# Altium PCB mini.PcbDoc
Units mil, origin at the board's own origin, x right, y up, seen from the top; angles counter-clockwise.
Board outline 2650 x 3065 mil, 2 copper layers (Top Layer, Bottom Layer); 37 components, 22 nets, 96 pads, 19 vias.
Unrouted connection lines stored in the file: 1.
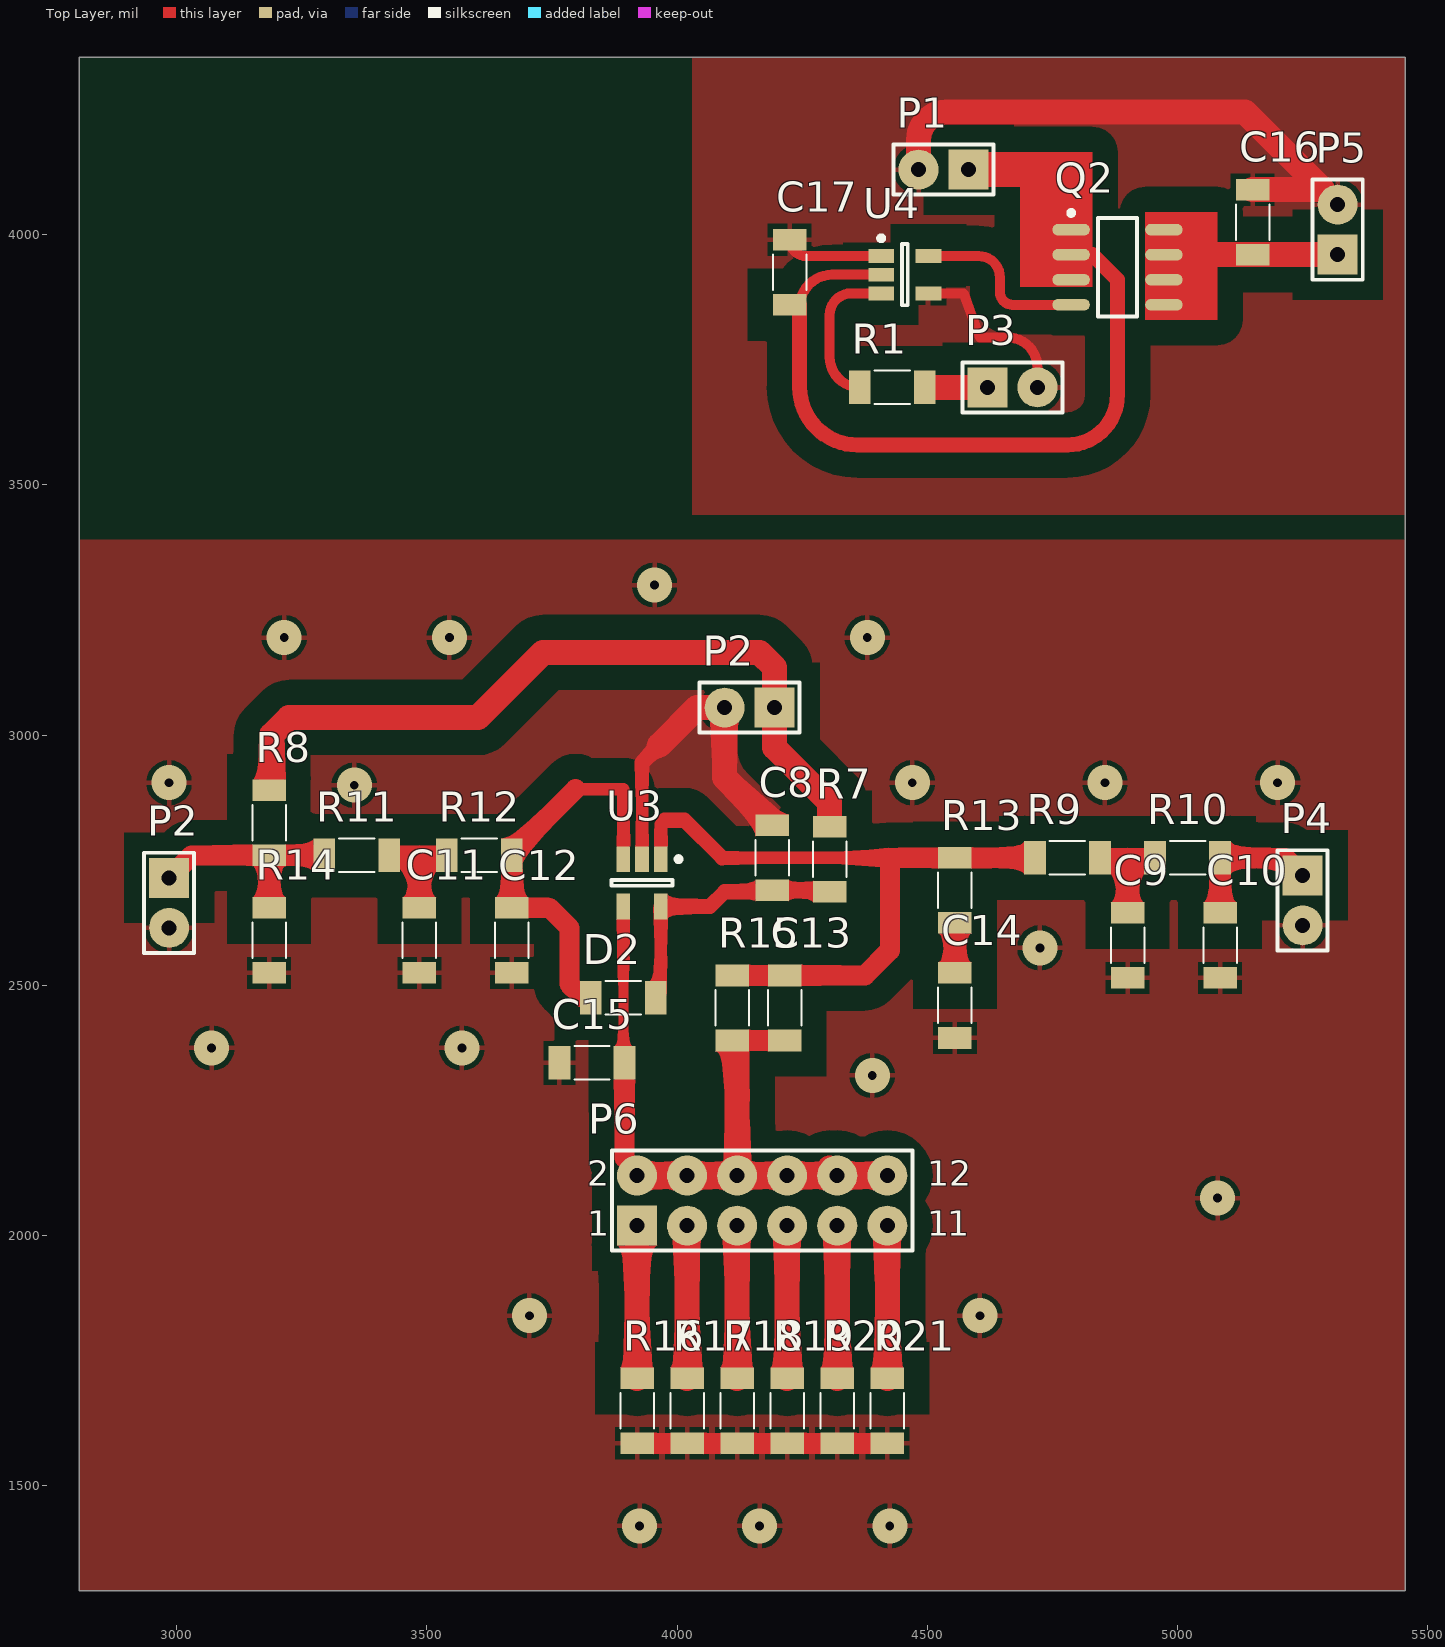
[diagram p0: Top Layer view]
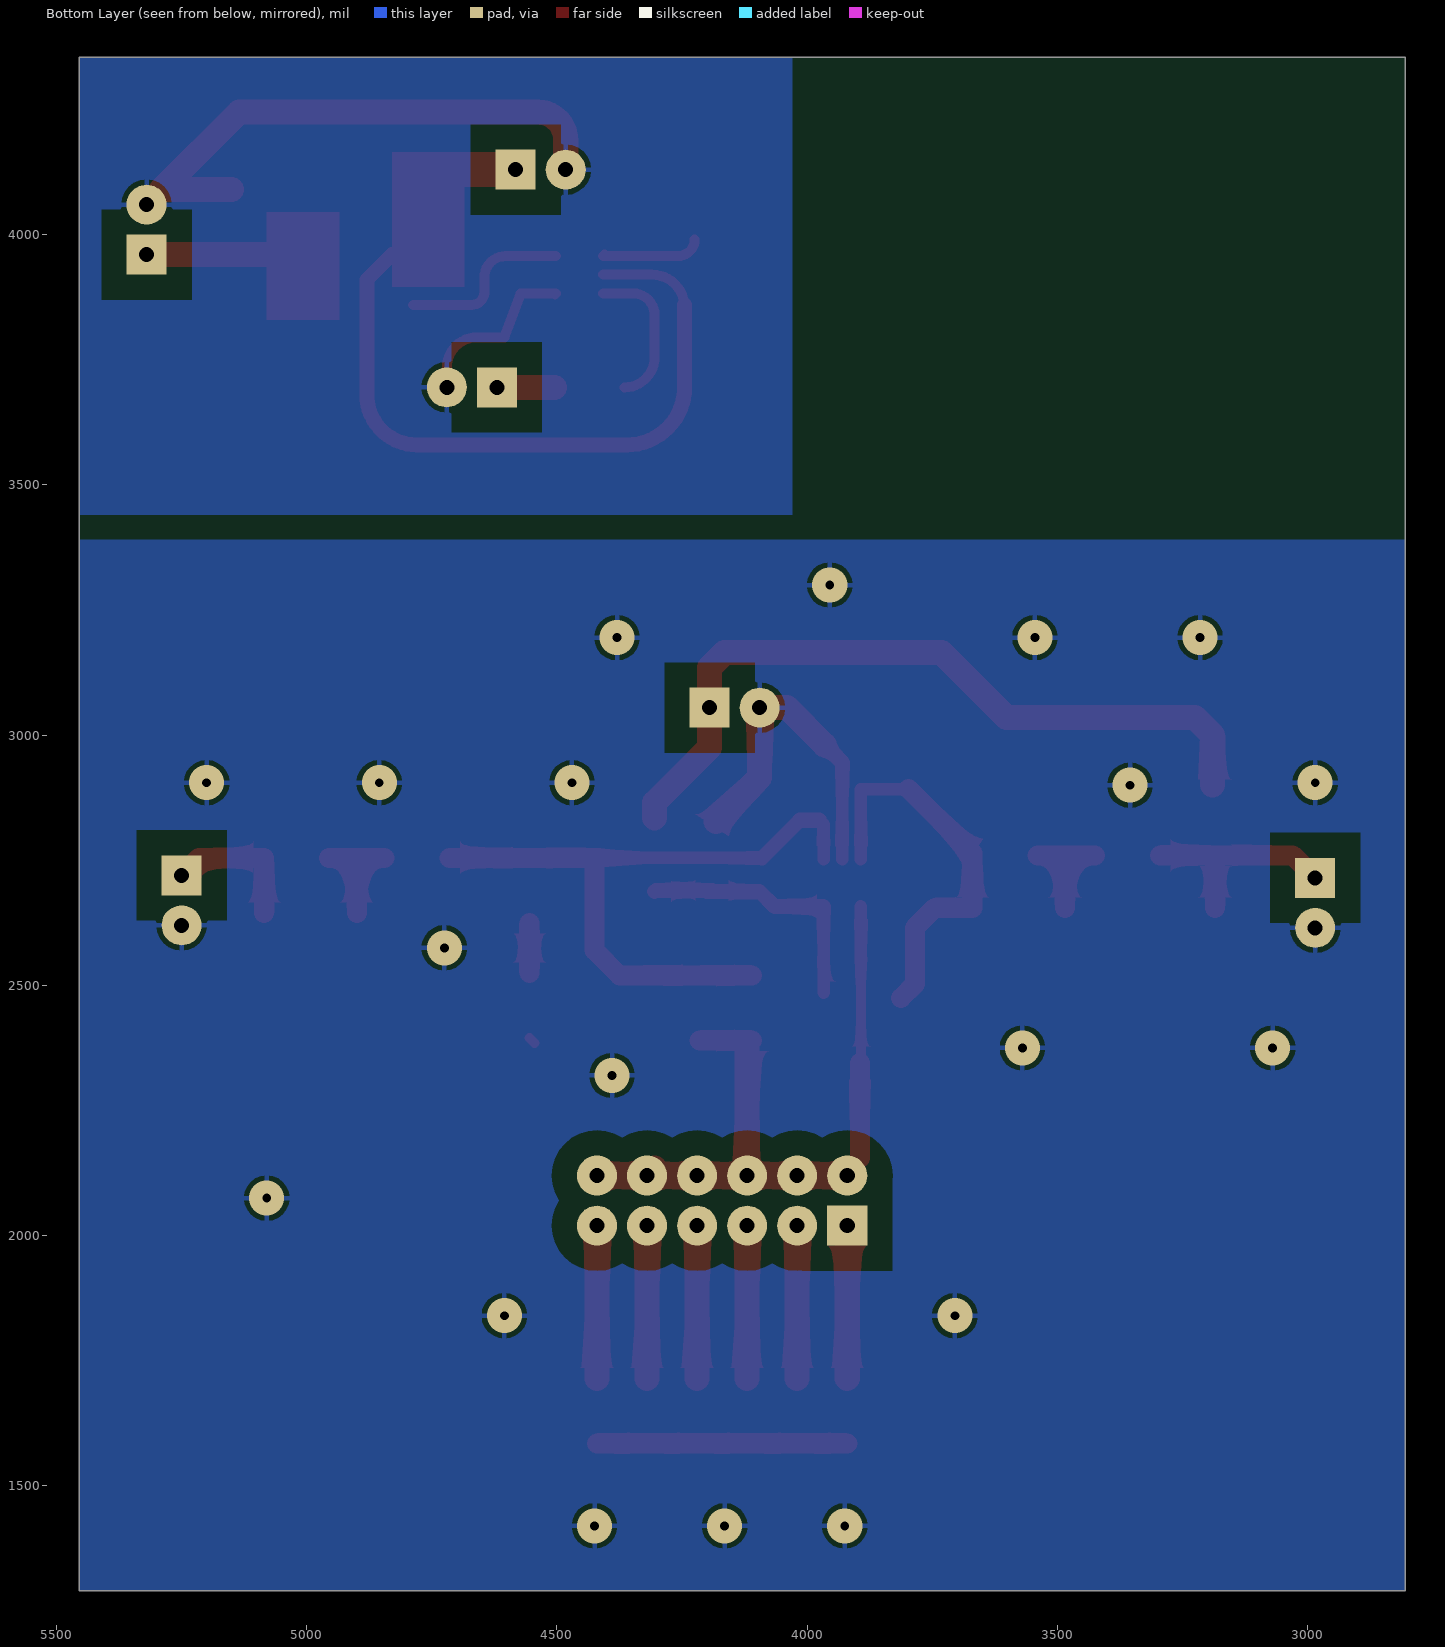
[diagram p1: Bottom Layer view, seen from below]
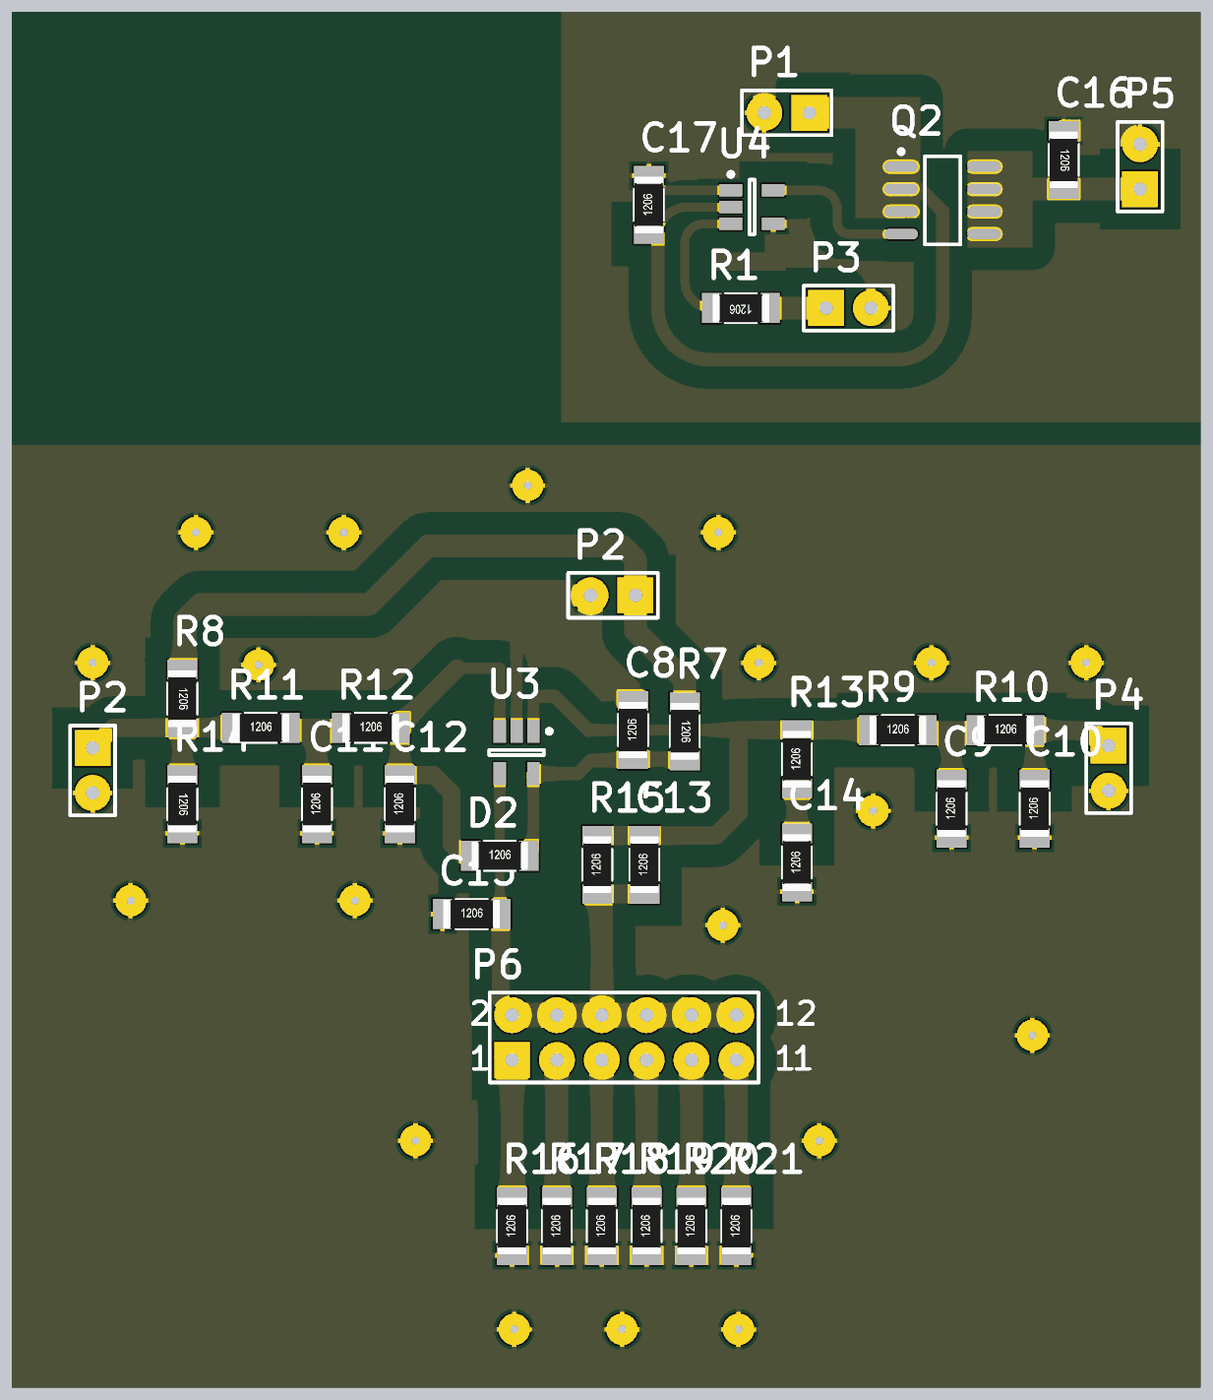
[diagram p2: 3D render of the assembled board from above, using the file's embedded part models]

## Layer stack, top to bottom
Top Solder: solder mask 0.4, Solder Resist, Dk 3.5
Top Layer: signal copper 1.4
Dielectric 1: dielectric 12.6, FR-4, Dk 4.8
Bottom Layer: signal copper 1.4
Bottom Solder: solder mask 0.4, Solder Resist, Dk 3.5

## Board outline
2805,1290 5455,1290 5455,4355 5180,4355 2805,4355

## Design rules (kind name [scope] priority, off if disabled: settings)
Clearance [All] p1: gap=50 except(10: SMDPad-SMDPad THPad-THPad)
PolygonConnect [All] p1: connectstyle=Relief reliefconductorwidth=10 reliefentries=4 polygonreliefangle="90 Angle" airgapwidth=10
RoutingVias [All] p1: holewidth=28 width=50 viastyle="Through Hole" minholewidth=28 minwidth=50 maxholewidth=28 maxwidth=50
SolderMaskExpansion [All] p1: expansion=4
Width [All] p1: maxlimit=50 minlimit=15 preferedwidth=20 minimp=50.000000 maximp=50.000000 favimp=50.000000
30 further rules are at their usual default settings.

## Classes and differential pairs
component class top: P1 P2 P3 P4 P5

## Components (designator, comment, footprint, x,y, rotation, side; value= is the part's Value field where it differs from the comment)
C8 "Cap" SMD_Resistor_1206 4190,2755 r90 top
C9 "Cap" SMD_Resistor_1206 4900,2580 r90 top
C10 "Cap" SMD_Resistor_1206 5085,2580 r90 top
C11 "Cap" SMD_Resistor_1206 3485,2590 r90 top
C12 "Cap" SMD_Resistor_1206 3670,2590 r90 top
C13 "Cap" SMD_Resistor_1206 4215,2455 r90 top
C14 "Cap" SMD_Resistor_1206 4555,2460 r90 top
C15 "Cap" SMD_Resistor_1206 3830,2345 r0 top
C16 "Cap" SMD_Resistor_1206 5150,4025 r270 top
C17 "Cap" SMD_Resistor_1206 4225,3925 r90 top
D2 "Diode" SMD_Resistor_1206 3892.6,2475 r0 top
P1 "Header 2" HDR1X2 4582.48,4130 r180 top
P2 "Header 2" HDR1X2 2985,2715 r270 top
P2 "Header 2" HDR1X2 4195,3055 r180 top
P3 "Header 2" HDR1X2 4620,3695 r0 top
P4 "Header 2" HDR1X2 5250,2720 r270 top
P5 "Header 2" HDR1X2 5320,3960 r90 top
P6 "Header 6X2" HDR2X6 3920,2020 r0 top
Q2 "IRF7416" SO-8_L 4880,3935 r0 top
R1 "Res2" SMD_Resistor_1206 4430,3695 r180 top
R7 "Res2" SMD_Resistor_1206 4305,2752.24 r270 top
R8 "Res2" SMD_Resistor_1206 3185,2825 r270 top
R9 "Res2" SMD_Resistor_1206 4780,2755 r0 top
R10 "Res2" SMD_Resistor_1206 5020,2755 r0 top
R11 "Res2" SMD_Resistor_1206 3360,2760 r0 top
R12 "Res2" SMD_Resistor_1206 3605,2760 r0 top
R13 "Res2" SMD_Resistor_1206 4555,2690 r90 top
R14 "Res2" SMD_Resistor_1206 3185,2590 r270 top
R15 "Res2" SMD_Resistor_1206 4110,2455 r90 top
R16 "Res2" SMD_Resistor_1206 3920,1650 r90 top
R17 "Res2" SMD_Resistor_1206 4020,1650 r90 top
R18 "Res2" SMD_Resistor_1206 4120,1650 r90 top
R19 "Res2" SMD_Resistor_1206 4220,1650 r90 top
R20 "Res2" SMD_Resistor_1206 4320,1650 r90 top
R21 "Res2" SMD_Resistor_1206 4420,1650 r90 top
U3 "AMP-OPA-MCP6031-SOT5" SOT-23-OT5_M 3930,2705 r270 top
U4 "IN-MOSDRV-MCP1402-5" SOT-23-OT5_M 4455,3920 r0 top

## Footprints (in the part's own frame and the unit in brackets; to place one, negate y for a bottom-side part, rotate by r counter-clockwise, add the part's x,y. Pads: shape width x height; smd on the part's side, far side on the other; paste and mask are expansions set on the pad)
HDR1X2 [mil] "Connector; Header; 2 Position"
  rect 80x80 hole 30: 1(0,0)
  round 80 hole 30: 2(100,0)
  silkscreen extent -50,-50 150,50
HDR2X6 [mil] "Connector; Header; 6x2 Position"
  rect 80x80 hole 30: 1(0,0)
  round 80 hole 30: 2(0,100) 3(100,0) 4(100,100) 5(200,0) 6(200,100) 7(300,0) 8(300,100) 9(400,0) 10(400,100) 11(500,0) 12(500,100)
  silkscreen extent -50,-50 550,150
SMD_Resistor_1206 [mm] "SMD Resistor, Inch 1206, Metric 3216."
  rect 1.1x1.7 smd: 1(-1.65,0) 2(1.65,0)
  silkscreen extent -0.9,-0.85 0.9,0.85, body extent -1.6,-0.8 1.6,0.8, height 0.8
SO-8_L [mm] "SOIC, 8-Leads, Body 4.9x3.9mm, Pitch 1.27mm, IPC High Density"
  oval 1.9x0.6 smd: 1(-2.35,1.905) 2(-2.35,0.635) 3(-2.35,-0.635) 4(-2.35,-1.905) 5(2.35,-1.905) 6(2.35,-0.635) 7(2.35,0.635) 8(2.35,1.905)
  silkscreen extent -2.47,-2.5 1,2.88, body extent -2,-2.5 2,2.5, height 1.75
SOT-23-OT5_M [mm] "SOT23, 5-Leads, Body 2.9x1.7mm, Pitch 0.95mm, Lead Span 2.8mm, IPC Low Density"
  rect 1.3x0.7 smd: 1(-1.2,0.95) 2(-1.2,0) 3(-1.2,-0.95) 4(1.2,-0.95) 5(1.2,0.95)
  silkscreen extent -1.32,-1.55 0.15,1.98, body extent -0.9,-1.55 0.9,1.55, height 1.45

## Part data
C8 C9 C10 C11 C12 C13 C14 C15 C16 C17: "Capacitor"
D2: "Default Diode"
P1 P2 P2 P3 P4 P5: "Header, 2-Pin"
P6: "Header, 6-Pin, Dual row"
Q2: "HEXFET Power MOSFET"
R1 R7 R8 R9 R10 R11 R12 R13 R14 R15 R16 R17 R18 R19 R20 R21: "Resistor"

## Via types
v1: diameter 70, hole 17.72, Top Layer to Bottom Layer, 19 vias

## Nets (pads, with @x,y where several pads share a name; then routed paths per layer and width w, separated by ;. In a path a pad name is that pad's centre, name@x,y a point inside that pad or via, vN(x,y) a via of type N, cw(c..) or ccw(c..) an arc to the next point about the centre after c; other vN are vias at no path point)
3V3: P2.1@4195,3055 R7.1 R8.1 | length 1531.4
  Top Layer w50: R8.1@3190,2899.96 3190,3000 3225,3035 3480,3035 3601.88,3035 3731.88,3165 4165,3165 4195,3135 4195,3055 4195,2975 4305,2865 R7.1@4305,2835
12V: C17.1 P1.1 Q2.1 Q2.2 Q2.3 U4.2 | length 1862.2
  Top Layer w20: C17.1@4245,3855 cw(c4310,3855) 4310,3920 U4.2
  Top Layer w30: 4245,3695 ccw(c4360,3695) 4360,3580 4780,3580 ccw(c4780,3680) 4880,3680 4880,3783.19 ; 4245,3700 C17.1@4245,3860 ; Q2.2 4830,3960 4880,3910 4880,3790
  Top Layer w50: 4787.48,3926.81 Q2.2 Q2.1 4787.48,4130
  Top Layer w70: P1.1 4787.48,4130
GND: C8.2 C9.1 C10.1 C11.1 C12.1 C14.1 C15.1 C16.1 C17.2 P1.2 P2.2 P3.2 P4.2 P5.2 R14.2 R16.1 R17.1 R18.1 R19.1 R20.1 R21.1 U3.2 U4.1 U4.4 | length 2845.2
  Top Layer w20: C17.2 ccw(c4257.56,3989.96) 4257.56,3957.4 U4.1 U4.1@4404.96,3960.2 ; U4.4@4504.23,3880.61 U4.4 4572.4,3882.6 4591.32,3831.76 4605,3795 4660,3795 cw(c4660,3735) 4720,3735 P3.2 ; C14.1@4545,2385.04 C14.1
  Top Layer w25: U3.2 3930,2945
  Top Layer w30: 3930,2945 3965,2980
  Top Layer w40: R16.1 R17.1 R18.1 R19.1 R20.1 R21.1
  Top Layer w50: 3965,2980 4040,3055 4095,3055 4095,2914.96 C8.2@4182.48,2827.48 ; P1.2 4482.48,4189.55 cw(c4537.93,4189.55) 4537.93,4245 5135,4245 5290.04,4089.96 C16.1
  other v1: 3925,1420 4165,1420 4425,1420 3705,1840 4605,1840 5080,2075 4390,2320 3070,2375 3570,2375 4725,2575 3355,2900 2985,2905 4470,2905 4855,2905 5200,2905 3215,3195 3545,3195 4380,3195 3955,3300
NetC8_1: C8.1 D2.2 R7.2 U3.5 | length 533.9
  Top Layer w25: D2.2@3967.4,2484.84 U3.5
  Top Layer w30: U3.5 4065.47,2657.76 4095,2687.28 C8.1@4200,2687.28 ; C8.1 4302.24,2690.04 R7.2
NetC9_2: C9.2 R9.2 R10.1 | length 220.1
  Top Layer w40: R9.2 4900,2755 ; C9.2 4900,2755 ; R10.1 4900,2755
NetC10_2: C10.2 P4.1 R10.2 | length 289.6
  Top Layer w40: C10.2 C10.2 R10.2 5215,2755 P4.1
NetC11_2: C11.2 R11.2 R12.1 | length 220.1
  Top Layer w40: R11.2 3485,2760 ; C11.2 3485,2760 ; R12.1 3485,2760
NetC12_2: C12.2 D2.1 R12.2 U3.3 | length 808.5
  Top Layer w25: 3797.4,2892.4 3892.6,2892.4 U3.3
  Top Layer w40: R12.2 3669.96,2764.96 3797.4,2892.4 ; R12.2 C12.2 3745.04,2654.96 3785,2615 3785,2502.6 D2.1@3812.6,2475
NetC13_1: C13.1 C15.2 P6.2 P6.4 P6.6 P6.8 P6.10 P6.12 R15.1 U3.4 | length 1386.6
  Top Layer w20: C15.2@3892.6,2347.36 3892.6,2557.6
  Top Layer w25: 3892.6,2557.6 U3.4
  Top Layer w40: 3894.96,2155.04 C15.2 ; R15.1 C13.1
  Top Layer w50: P6.2 P6.4 P6.6 ; R15.1@4120,2380.04 P6.6 ; P6.10@4305,2135 P6.10 ; P6.12 P6.10 ; P6.6 P6.8 P6.10
NetC13_2: C13.2 R9.1 R13.2 R15.2 U3.1 | length 1372.8
  Top Layer w25: U3.1 3967.4,2822.4 3975,2830 ; 4090,2755 4425,2755
  Top Layer w30: 3975,2830 4015,2830 4090,2755
  Top Layer w40: R15.2 C13.2 4375,2519.96 4425,2569.96 4425,2755 R9.1
NetC14_2: C14.2 R13.1 | length 100.1
  Top Layer w40: C14.2 R13.1
NetC16_2: C16.2 P5.1 Q2.5 Q2.6 Q2.7 Q2.8 | length 508.1
  Top Layer w20: P5.1@5312.5,3967.5 P5.1@5320,3975
  Top Layer w50: Q2.5 Q2.6 Q2.7 ; Q2.8 Q2.7 ; P5.1 Q2.7
NetP2_1: P2.1@2985,2715 R8.2 R11.1 R14.1 | length 433.8
  Top Layer w40: P2.1@2985,2715 3030.04,2760.04 R8.2 ; R14.1 R8.2 ; R11.1 R8.2 R8.2
NetP3_1: P3.1 R1.1 | length 115
  Top Layer w50: R1.1@4505,3695 P3.1
NetP6_1: P6.1 R16.2 | length 305
  Top Layer w50: R16.2 P6.1
NetP6_3: P6.3 R17.2 | length 305
  Top Layer w50: R17.2 P6.3
NetP6_5: P6.5 R18.2 | length 305
  Top Layer w50: R18.2 P6.5
NetP6_7: P6.7 R19.2 | length 305
  Top Layer w50: R19.2 P6.7
NetP6_9: P6.9 R20.2 | length 305
  Top Layer w50: R20.2 P6.9
NetP6_11: P6.11 R21.2 | length 305
  Top Layer w50: R21.2 P6.11
NetQ2_4: Q2.4 U4.5 | length 353.7
  Top Layer w20: U4.5 4602.6,3957.4 cw(c4602.6,3915) 4645,3915 4645,3885 ccw(c4670,3885) 4670,3860 Q2.4
NetR1_2: R1.2 U4.3 | length 306.3
  Top Layer w20: R1.2 cw(c4365.04,3755.04) 4305,3755.04 4305,3840 cw(c4347.6,3840) 4347.6,3882.6 U4.3

## Polygon pours and split planes (outlines as drawn)
GND on Top Layer "Top Layer-No Net" (solid, remove dead copper, pour order 4): 2805,3390 5455,3390 5455,1290 2805,1290
GND on Top Layer "Top Layer-No Net" (solid, remove dead copper, pour order 2): 4030,3440 5455,3440 5455,4355 4030,4355
GND on Bottom Layer "Top Layer-No Net" (solid, remove dead copper, pour order 7): 4030,3440 4030,4355 5455,4355 5455,3440
GND on Bottom Layer "Top Layer-No Net" (solid, remove dead copper, pour order 8): 2805,3390 2805,1290 5455,1290 5455,3390

## Other copper
Top Layer:
  rectangle net NetC16_2: 4935,3830 5080,4045
  rectangle net 12V: 4685,3895 4830,4165

## Dimensions
2800,1300 to 5450,1285 on Mechanical 1
5460,1290 to 5460,3395 on Mechanical 1
5455,4355 to 4030,4355 on Mechanical 1

## Text inside footprints (layer, text, board x,y; h text height)
P6: Top Overlay "12" at 4500,2100 h50; Top Overlay "1" at 4540,2000 h50; Top Overlay "1" at 4500,2000 h50; Top Overlay "1" at 3820,2000 h50; Top Overlay "2" at 3820,2100 h50